# EAGLE board 2DD-17-mk-1.2 (EAGLE 7.5.0)
VERSION: v1.2
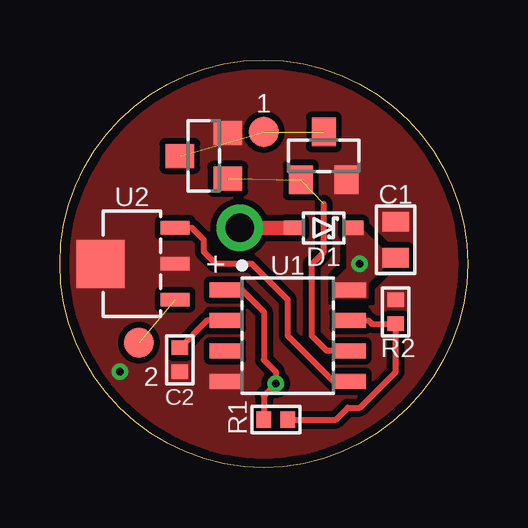
[diagram p0: board, top side]
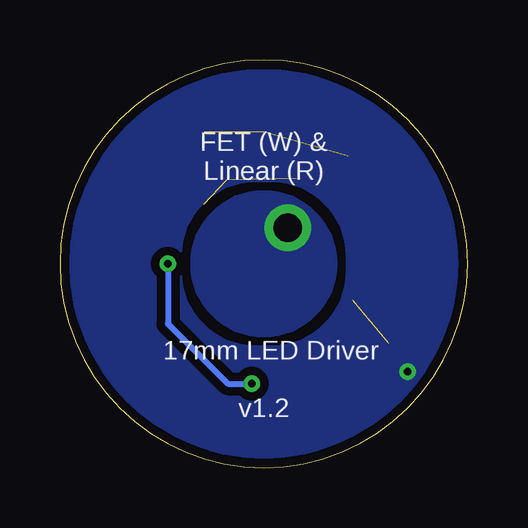
[diagram p1: board, bottom side, seen from below]

Size 17 x 17 mm. Coordinates in mm from the lower left corner, seen from the top.
Outline: 0,8.5 arc-180 17,8.5 arc-180 0,8.5
Copper layers (1*16): Top 0.0356mm / dielectric 1.5011mm / Bottom 0.0356mm
Design rules "LaenPCBOrder2": minimum track width 6mil, minimum drill 13mil, track to track 6mil, track to pad 6mil, pad to pad 6mil, via to via 6mil, smd to smd 6mil, copper to edge 15mil, drill to drill 6mil, minimum pad ring 7mil, minimum via ring 7mil, stop-mask expansion 3mil, vias tented up to drill 20mil, thermal gap 10mil

## Footprints (pad centres in the part's own frame; a part is rotated, then mirrored left to right if it is on the bottom)
1X01-SMD-1.25MM-DIA-NS = smd 1.25 x 1.25: P$1 0,0
1X01-1.2MM-NS = drill 1.2 pad 1.93: P$1 0,0
1X01_NOSILK_NOSTOP = drill 0.33: P$1 0,0
C0603-TIGHTER = smd 0.8 x 1.1: 1 -0.75,0; 2 0.75,0
C0402 = smd 0.6 x 0.7: 1 -0.5,0; 2 0.5,0
SOD323-SCHOTTKY = smd 0.8 x 0.6: A -1.25,0; C 1.25,0
SOT23 = smd 1 x 1.2: 1 -0.95,-1; 2 0.95,-1; 3 0,1
R0402 = smd 0.6 x 0.7: 1 -0.5,0; 2 0.5,0
SO08-NARROWER = smd 0.635 x 1.27: 1 -1.905,-2.616; 2 -0.635,-2.616; 3 0.635,-2.616; 4 1.905,-2.616; 5 1.905,2.616; 6 0.635,2.616; 7 -0.635,2.616; 8 -1.905,2.616
SOT89-NOTHERM = smd 0.58 x 1.2: 1 -1.5,-1.8; 3 1.5,-1.8; 4@1 0,-1.8 | smd 2 x 2: 4@2 0,1.3

## Placement (x,y rotation side)
1  M01SMD-1.25MM-DIA  [1X01-SMD-1.25MM-DIA-NS]  8.5,14 270 top
2  M01SMD-1.25MM-DIA  [1X01-SMD-1.25MM-DIA-NS]  3.3,5.2 0 top
+  M01PTH-1.2MM-NS  [1X01-1.2MM-NS]  7.5,10 90 top
-  M01NOT-A-VIA-NOPE  [1X01_NOSILK_NOSTOP]  2.5,4 90 bottom
C1  1u  [C0603-TIGHTER]  14,9.5 90 top
C2  1u  [C0402]  5,4.5 270 top
D1  BAT165  [SOD323-SCHOTTKY]  11,10 0 top
FRAME1  FRAME-LETTERNO_PACKAGE  [DUMMY]  0,0 0 top
Q1  MOSFET-NCHANNELIRLML2502  [SOT23]  6,13 90 top
Q2  MOSFET-NCHANNELIRLML2502  [SOT23]  11,13 0 top
R1  19K  [R0402]  9,2 180 top
R2  4K7  [R0402]  14,6.5 270 top
U1  ATTiny13  [SO08-NARROWER]  9.5,5.5 270 top
U2  AMC7135SOT-89-NOTHERM  [SOT89-NOTHERM]  3,8.5 90 top

## Library data of the parts
1 2 + - C1 C2 D1 Q1 Q2 R1 R2 U1 U2 = a_parts
FRAME1 = a_parts; DESIGNER: sean@yak.net; VERSION: v1.2

## Nets
GND: -.P$1 C1.2 C2.2 Q1.2 Q2.2 R2.1 U1.4 U2.4@1 U2.4@2
N$1: R1.1 R2.2 U1.7
N$2: C2.1 U1.2
PWM_R: U1.5 U2.3
PWM_W: Q1.1 Q2.1 U1.6
R: 2.P$1 U2.1
VBAT: +.P$1 D1.A
VCC: C1.1 D1.C R1.2 U1.1 U1.8
W: 1.P$1 Q1.3 Q2.3

## Tracks (layer width: path | path; a pad name or v marks a point on that pad's centre or on a via)
GND
  pour Top (isolate 0.25, rank 6, no thermals): 0,0 17,0 17,17 0,17
  pour Bottom (isolate 0.35, rank 6, no thermals): 0,0 0,17 17,17 17,0
N$1
  Top 0.25: U1.7 12.87,6.13 13,6 R2.2 14,4 12.5,2.5 12,2.5 11.5,2 R1.1
N$2
  Top 0.25: U1.2 6.13,6.13 C2.1
PWM_R
  Top 0.25: U1.5 11.4,3.6 9.5,5.5 9.5,7 8,8.5 6.5,8.5 6,9 6,9.5 5.5,10 U2.3
PWM_W  (2 unrouted)
  Top 0.25: U1.6 11.13,4.87 10.5,5.5 10.5,8.5 11,9 11,11
R  (1 unrouted)
VBAT
  Top 0.6: +.P$1 D1.A
  pour Bottom (isolate 0.152, no thermals): 5.5,8.5 arc-180 11.5,8.5 arc-180
VCC  (via drill 0.33)
  Top 0.25: R1.2 8.5,3 v9,3.5 9,4 8.5,4.5 8.5,6.5 7.59,7.41 U1.1
  Bottom 0.25: v12.5,8.5 12.5,6 10,3.5 v9,3.5
  pour Top (isolate 0.152, no thermals): 11.5,7.1 11.5,7.8 12,8.3 12,9.9 12.6,9.9 13.5,9 14.4,9 14.4,8.4 13.5,8.4 12.8,7.7 12.8,7.1
W  (2 unrouted)

## Text on the board
bPlace: FET (W) & / Linear (R) | 17mm LED Driver